# Altium PCB P5_Magic.PcbDoc
Units mil, origin at the board's own origin, x right, y up, seen from the top; angles counter-clockwise.
Board outline 600 x 2750 mil, 2 copper layers (Top Layer, Bottom Layer); 10 components, 8 nets, 48 pads, 1 vias.
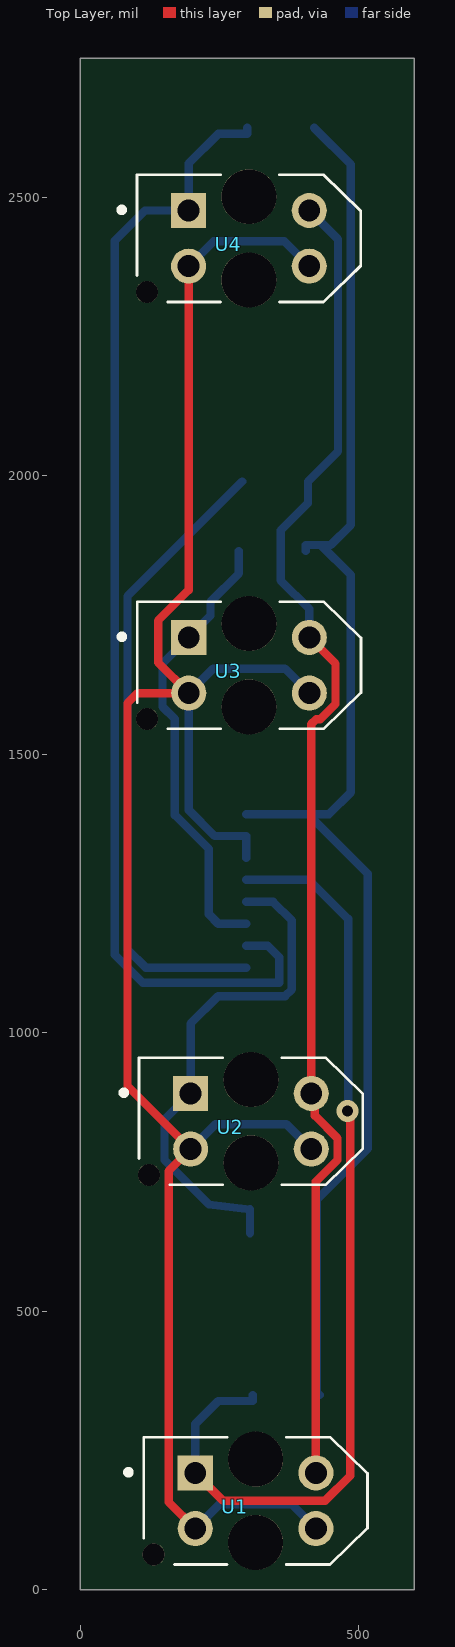
[diagram p0: Top Layer view]
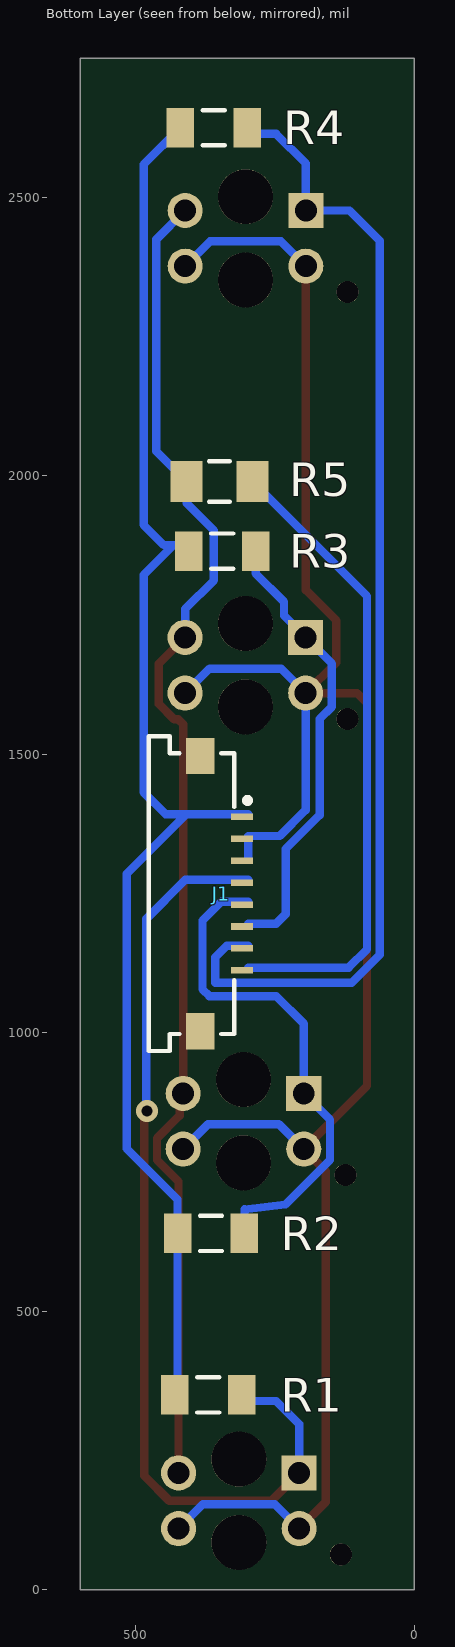
[diagram p1: Bottom Layer view, seen from below]

## Layer stack, top to bottom
Top Solder: solder mask 0.4, Solder Resist, Dk 3.5
Top Layer: signal copper 1.4
Dielectric 1: dielectric 12.6, FR-4, Dk 4.8
Bottom Layer: signal copper 1.4
Bottom Solder: solder mask 0.4, Solder Resist, Dk 3.5

## Board outline
0,0 600,0 600,2750 0,2750

## Design rules (kind name [scope] priority, off if disabled: settings)
BoardOutlineClearance [All] p1: gap=7.87 ignorepadtopadclearanceinfootprint=FALSE except(15.75: Arc-SplitBarrior Arc-SplitContinuation Track-SplitBarrior Track-SplitContinuation SMDPad-SplitBarrior SMDPad-SplitContinuation THPad-SplitBarrior THPad-SplitContinuation Via-SplitBarrior Via-SplitContinuation Fill-SplitBarrior Fill-SplitContinuation Poly-SplitBarrior Poly-SplitContinuation Region-SplitBarrior Region-SplitContinuation Text-SplitBarrior Text-SplitContinuation)
Clearance "Clearance Bottom Layer" [OnLayer('Bottom Layer')] p1: gap=8 ignorepadtopadclearanceinfootprint=TRUE except(10: Arc-Text Track-Text SMDPad-Text THPad-Text Via-Text Fill-Text Poly-Text Region-Text Text-Text)
Clearance "Clearance Top Layer" [OnLayer('Top Layer')] p2: gap=8 ignorepadtopadclearanceinfootprint=TRUE except(10: Arc-Text Track-Text SMDPad-Text THPad-Text Via-Text Fill-Text Poly-Text Region-Text Text-Text)
Clearance [All] p3: gap=7.87 ignorepadtopadclearanceinfootprint=FALSE except(3.5: Arc-Arc Arc-Track Arc-SMDPad Track-Track Track-SMDPad SMDPad-SMDPad; 5: Arc-Via Track-Via SMDPad-Via THPad-Via Via-Via; 10: Arc-Text Track-Text SMDPad-Text THPad-Text Via-Text Fill-Text Poly-Text Region-Text Text-Text)
HoleSize [All] p1: absolutevalues=TRUE maxlimit=248.03 minlimit=7.87 maxpercent=80.000 minpercent=20.000
MinimumAnnularRing [All] p1: minimumring=3
MinimumSolderMaskSliver [All] p1: minsoldermaskwidth=3.94
PolygonConnect PolygonConnect_1 [All] p1: thpad.connectstyle=Relief thpad.reliefconductorwidth=20 thpad.reliefentries=4 thpad.polygonreliefangle="90 Angle" thpad.airgapwidth=10 smdpad.connectstyle=Relief smdpad.reliefconductorwidth=20 smdpad.reliefentries=4 smdpad.polygonreliefangle="90 Angle" smdpad.airgapwidth=10 via.connectstyle=Direct via.reliefconductorwidth=20 via.reliefentries=4 via.polygonreliefangle="90 Angle" via.airgapwidth=10
RoutingCorners [All] p1: cornerstyle=Round minsetback=100 maxsetback=100
RoutingVias [All] p1: holewidth=19.68 width=39.37 viastyle="Through Hole" minholewidth=7.87 minwidth=17.72 maxholewidth=39.37 maxwidth=78.74
SilkToSilkClearance [All] p1: silktosilkclearance=3.94
SilkToSolderMaskClearance [IsPad] p1: minsilkscreentomaskgap=3.94 clearancetoexposedcopper=TRUE
SolderMaskExpansion [All] p1: expansion=4 istentingtop=FALSE
Width [All] p1: maxlimit=100 minlimit=3.5 preferedwidth=15
25 further rules are at their usual default settings.

## Components (designator, comment, footprint, x,y, rotation, side; value= is the part's Value field where it differs from the comment)
J1 "Magic" 686108183422 400,1250 r270 bottom
R1 "10k" RESC3116X65X40ML10T20 370,350 r180 bottom
R2 "10k" RESC3116X65X40ML10T20 365,640 r180 bottom
R3 "10k" RESC3116X65X40ML10T20 345,1865 r180 bottom
R4 "10k" RESC3116X65X40ML10T20 360,2625 r180 bottom
R5 "390Ω" FP-MCR18-IPC_A 350,1990 r0 bottom
U1 "TCRT5000L" XDCR_TCRT5000L 315,160 r0 top
U2 "TCRT5000L" XDCR_TCRT5000L 306.73,841.34 r0 top
U3 "TCRT5000L" XDCR_TCRT5000L 303.27,1660 r0 top
U4 "TCRT5000L" XDCR_TCRT5000L 303.07,2426.46 r0 top

## Footprints (in the part's own frame and the unit in brackets; to place one, negate y for a bottom-side part, rotate by r counter-clockwise, add the part's x,y. Pads: shape width x height; smd on the part's side, far side on the other; paste and mask are expansions set on the pad)
686108183422 [mm] "ZIF Connectors, Horizontal, Top Contact Low Profile, pitch 1mm, 8p"
  rect 0.3x1 smd: 1(-3.5,2.3) 2(-2.5,2.3) 3(-1.5,2.3) 4(-0.5,2.3) 5(0.5,2.3) 6(1.5,2.3) 7(2.5,2.3) 8(3.5,2.3)
  rect 1.65x1.3 smd: M1(-6.275,0.4) M2(6.275,0.4)
  silkscreen extent -7.18,-1.95 7.18,2.67, body extent -7.1,-1.9 7.1,2.35, height 1.28
FP-MCR18-IPC_A [mil]
  rect 57.31x73.16 smd paste+0 mask+0: 1(-59.1,0) 2(59.1,0)
  silkscreen extent -19,-37 19,37, body extent -63,-31 63,31, height 26
RESC3116X65X40ML10T20 [mm] "Chip Resistor, 2-Leads, Body 3.10x1.60mm, IPC Low Density"
  rect 1.25x1.8 smd: 1(-1.525,0) 2(1.525,0)
  silkscreen extent -0.5,-0.8 0.5,0.8, body extent -1.6,-0.85 1.6,0.85, height 0.65
XDCR_TCRT5000L [mm]
  rect 1.6x1.6 hole 1: 1(-2.75,1.27)
  round 1.6 hole 1: 2(-2.75,-1.27) 3(2.75,-1.27) 4(2.75,1.27)
  round 1 hole 1 unplated: ""(-4.65,-2.45)
  round 2.5 hole 2.5 unplated: ""(0,-1.9) ""(0,1.9)
  silkscreen extent -5.92,-2.9 5.1,2.9

## Part data
J1: library part CMP-1502-01494-2, "686108183422", Contact Resistance=30mΩ, Current Rating=800mA, Insulation Resistance=100MΩ, Max Operating Temperature=85°C, Min Operating Temperature=-25°C, Operating Supply Voltage=50V, Contact Plating=Tin, Gender=Receptacle, Lead Pitch=1mm, Length=9.1mm, NexarPartId=81848304, Number of Pins=8, Orientation=Horizontal, Packaging="Tape and Reel", Pitch=1mm, RoHS=Compliant
R1 R2 R3 R4: library part CMP-2003-04020-1, Manufacturer=Yageo, Part Number=RC1206JR-1310KL
R5: library part CMP-08839-021911-1, "MCR18EZPF3900 / Thick Film Chip Resistor, 1206, 390Ω, 1%, 100ppm/°C, 0.25W, 200V", Case Code (Imperial)=1206, Case Code (Metric)=3216, Max Operating Temperature=155°C, Max Power Dissipation=250mW, Min Operating Temperature=-55°C, Package Quantity=1, Resistance=390R, Resistor Type="Thick Film", Temperature Coefficient=100ppm/°C, Tolerance=1%, Voltage Rating (DC)=200V, Case/Package=1206, Features="Automotive AEC-Q200", Height=0.026inch, Lead Free="Lead Free", Length=0.126inch, Number of Terminations=2, Packaging="Tape and Reel", Power Rating=250mW, RoHS Compliant=Yes, Series=MCR18, Size Code=1206, Width=0.063inch
U1 U2 U3 U4: library part CMP-063-000000-1, "Reflective Optical Sensor 0.591 _15mm_ PCB Mount", Package="PCB Mount Vishay Semiconductor", Availability=Unavailable, Component Type=Standard, Design Item ID=TCRT5000L, MF=Vishay, MP=TCRT5000L, Pin Count=4, Price=None, SnapEDA_Link=https://www.snapeda.com/parts/TCRT5000L/Vishay%20Semiconductor%20Opto%20Division/view-part/229608/?ref=snap, Source=SnapEDAsch.SchLib

## Via types
v1: diameter 39.37, hole 19.68, Top Layer to Bottom Layer, 1 vias

## Nets (pads, with @x,y where several pads share a name; then routed paths per layer and width w, separated by ;. In a path a pad name is that pad's centre, name@x,y a point inside that pad or via, vN(x,y) a via of type N, cw(c..) or ccw(c..) an arc to the next point about the centre after c; other vN are vias at no path point)
GND_P5: J1.2 J1.3 U1.2 U1.3 U2.2 U2.3 U3.2 U3.3 U4.2 U4.3 | length 3879.5
  Top Layer w15: U4.2 194.8,1794.8 140,1740 140,1665 U3.2 103,1610 85,1592 85,904.8 U2.2 159,751.87 159,157.73 U1.2
  Bottom Layer w15: U4.2 239.35,2421 366.79,2421 U4.3 ; U2.2 243.13,836 370.34,836 U2.3 ; U1.2 250.73,154 379.27,154 U1.3 ; J1.3@298.43,1314.06 298.43,1353.43 241.57,1353.43 195,1400 U3.2 239,1654 367.54,1654 U3.3
LED_High_P5: R5.2 U1.4 U2.4 U3.4 U4.4 | length 2429.1
  Top Layer w15: U3.4 458.53,1663 458.53,1590.53 431,1563 423.79,1563 415,1554.22 U2.4 421.41,884.93 421.41,851.39 462,810.8 462,771.87 423.27,733.14 U1.4
  Bottom Layer w15: U4.4 463,2424.79 463,2043.9 R5.2 409.1,1951.1 360,1902 360,1812.54 411.54,1761 U3.4
Magic_Activate_P5: J1.8 R5.1 | length 1152.3
  Bottom Layer w15: R5.1 85,1784.1 85,1150 117.8,1117.2 J1.8@298.43,1117.2
Magic_Read_1_P5: J1.4 R1.2 U1.1 | length 1750.8
  Top Layer w15: U1.1 256.73,160 440,160 484.66,204.66 484.66,762.01 485,762.34 485,820.33 484.66,820.66 484.66,855.34 v1(480,860)
  Bottom Layer w15: U1.1 206.73,297.73 248,339 309.96,339 R1.2 ; J1.4@298.43,1274.69 411.31,1274.69 481.28,1204.72 481.28,861.28 v1(480,860)
Magic_Read_2_P5: J1.5 R2.2 U2.1 | length 920.8
  Bottom Layer w15: J1.5@298.43,1235.32 346.68,1235.32 380.23,1201.77 380.23,1078.23 368,1066 248,1066 198.46,1016.46 U2.1 151.47,844.34 151.47,771.87 231.34,692 304.96,683.04 R2.2
Magic_Read_3_P5: J1.6 R3.2 U3.1 | length 817.6
  Bottom Layer w15: R3.2 284.96,1824.96 234,1774 234,1749 U3.1 148,1663 148,1585.5 170,1563.5 170,1391 231,1330 231,1212.94 248,1195.94 J1.6@298.43,1195.94
Magic_Read_4_P5: J1.7 R4.2 U4.1 | length 2089
  Bottom Layer w15: J1.7@298.43,1156.57 336.66,1156.57 357.23,1136 357.23,1089.89 112.58,1089.89 62,1140.47 62,2422 116.46,2476.46 U4.1 194.8,2560.8 248,2614 299.96,2614 R4.2
VCC_P5: J1.1 R1.1 R2.1 R3.1 R4.1 | length 2644.5
  Bottom Layer w15: J1.1@298.43,1392.8 409.2,1392.8 ; R3.1 405.04,1876 432,1876 ; R4.1 486,2559.04 486,1912 450,1876 432,1876 ; R1.1 425.04,355 R2.1 425.04,701 516.46,792.42 516.46,1285.54 409.2,1392.8 ; 409.2,1392.8 446.8,1392.8 486,1432 486,1822 432,1876
pads on no net: J1.M1 J1.M2 U1. U2. U3. U4.